# EAGLE board 00B-001-A (EAGLE 6.3)
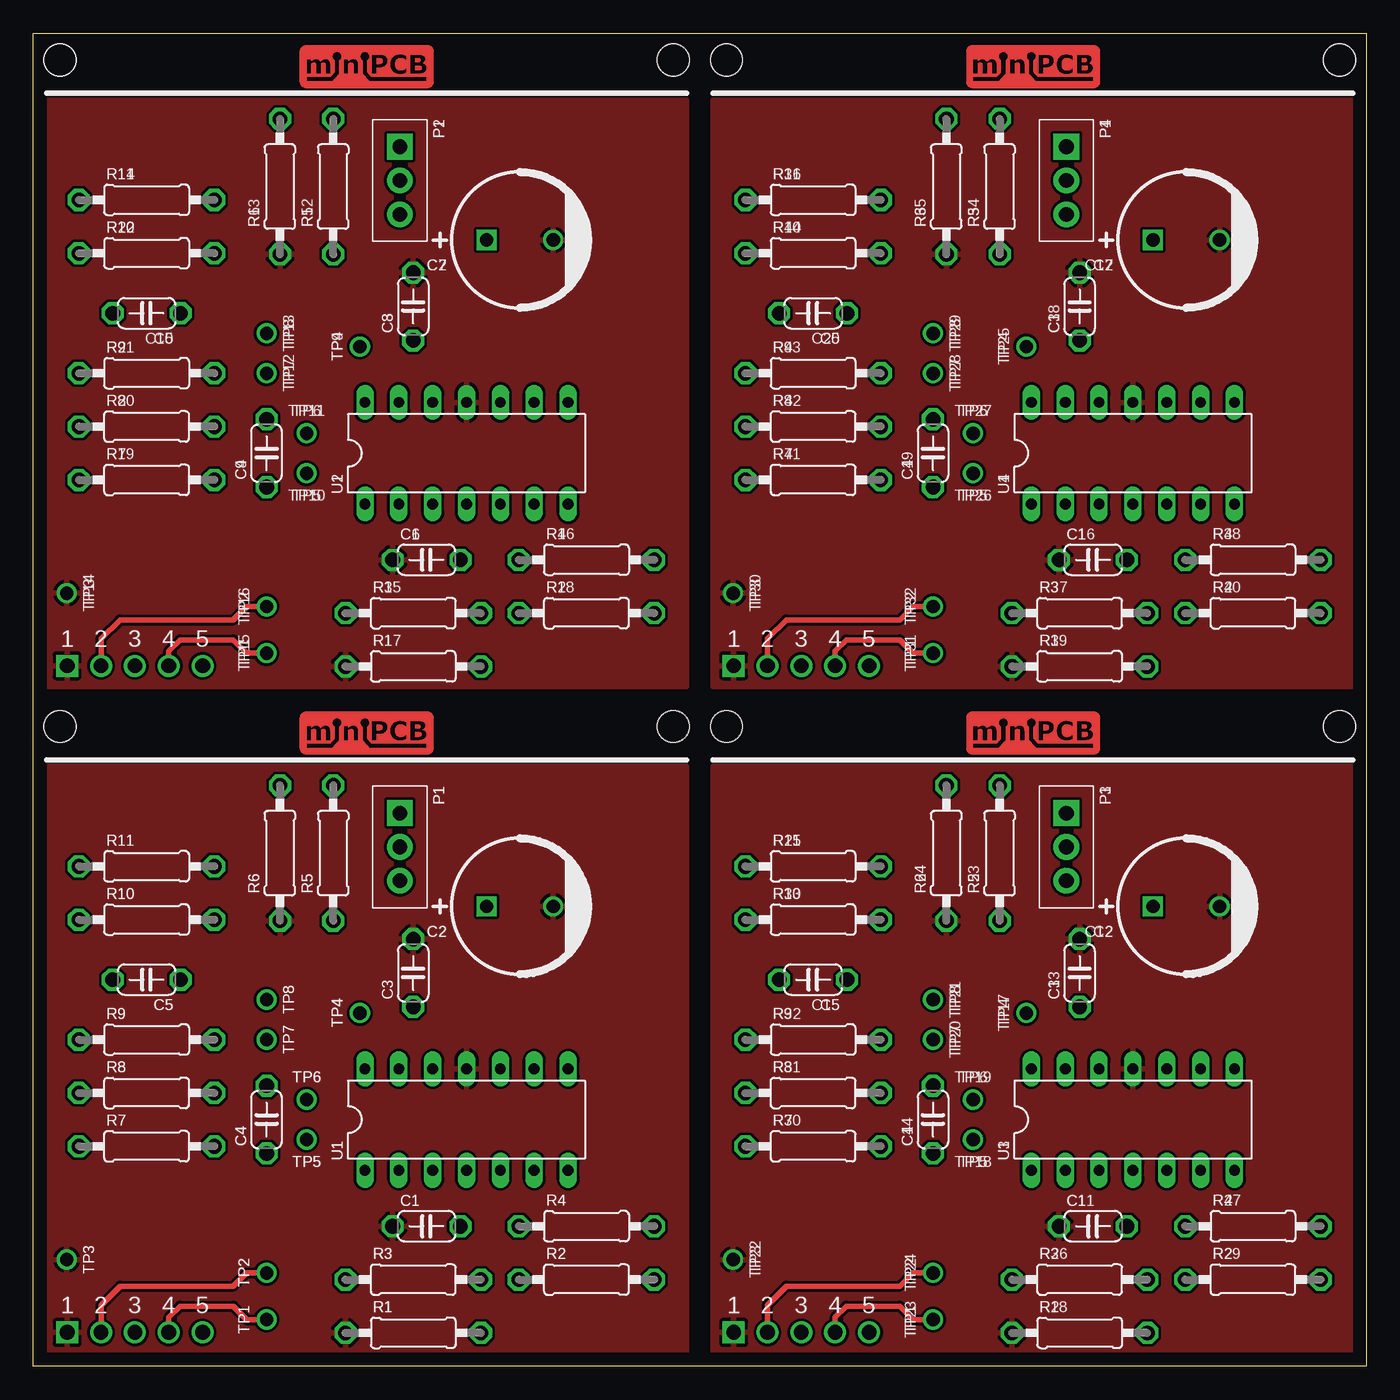
[diagram p0: board, top side]
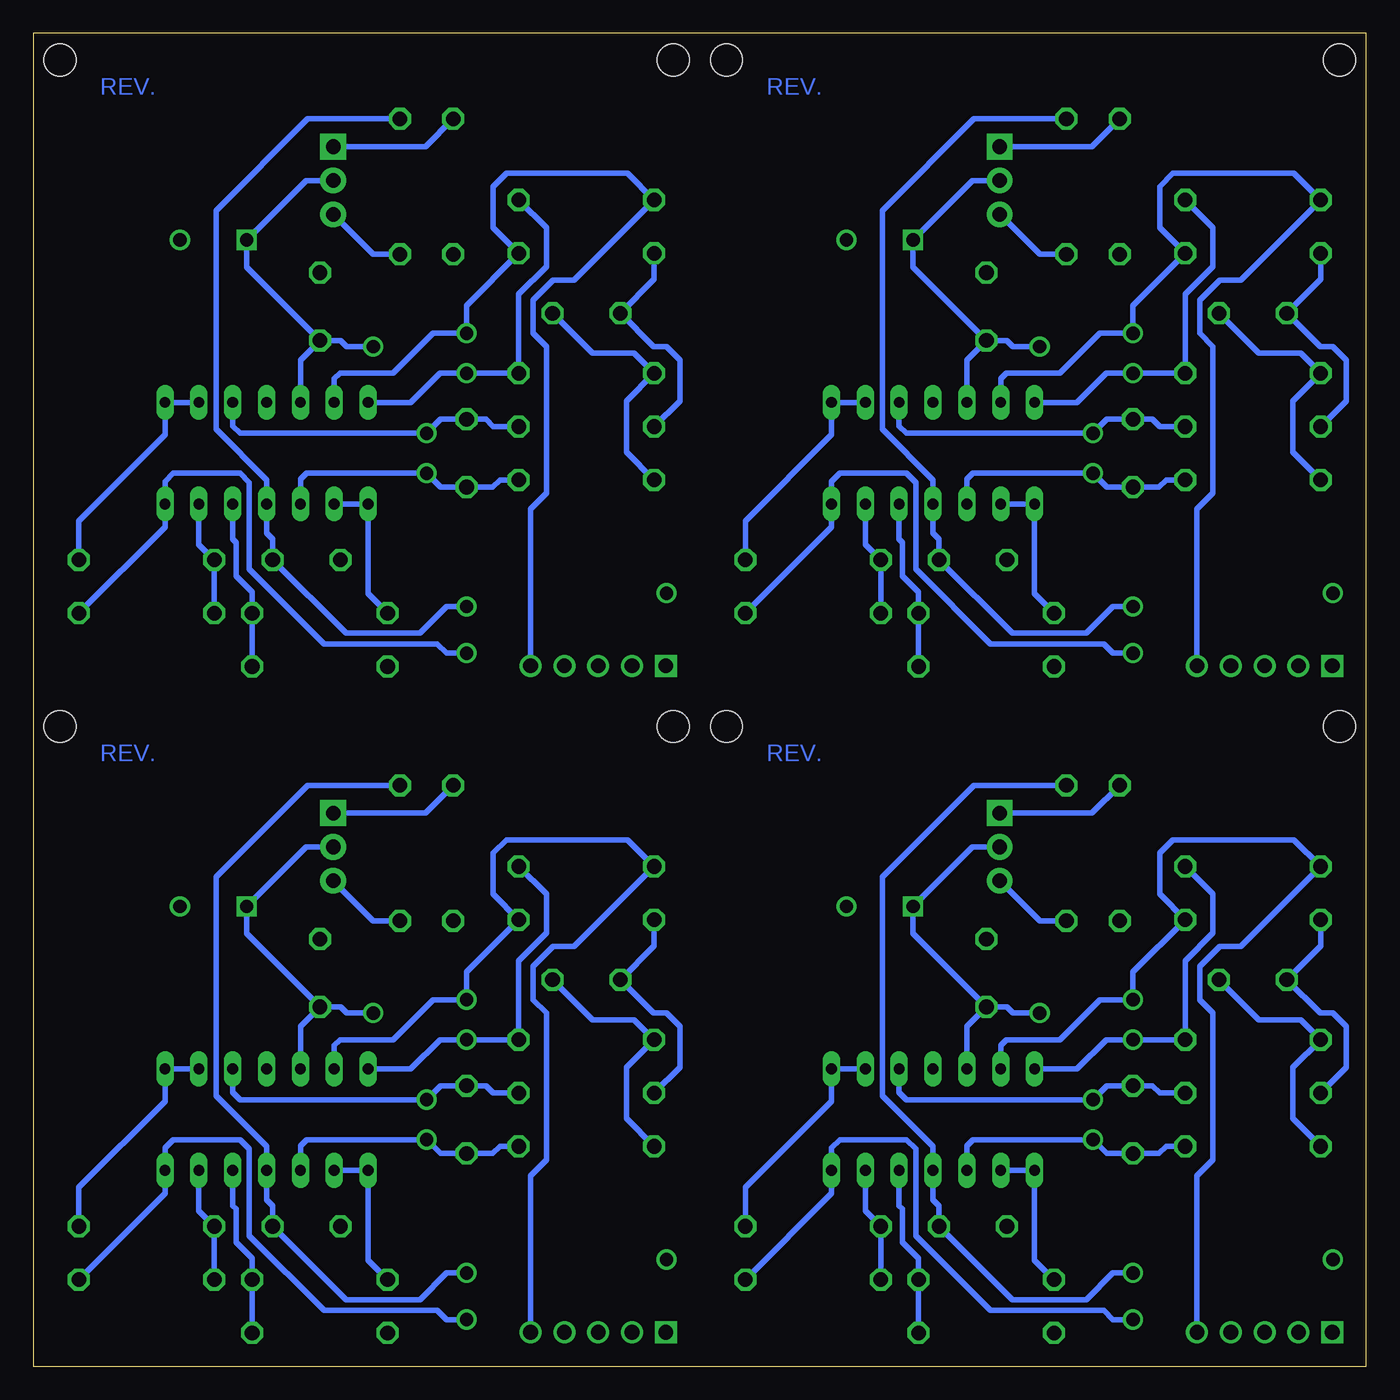
[diagram p1: board, bottom side, seen from below]

Size 100 x 100 mm. Coordinates in mm from the lower left corner, seen from the top.
Outline: 0,0 0,100 100,100 100,0 0,0
Copper layers (1*16): Top 0.035mm / dielectric 1.5mm / Bottom 0.035mm
Design rules "default": minimum track width 10mil, minimum drill 24mil, track to track 8mil, track to pad 8mil, pad to pad 8mil, via to via 8mil, smd to smd 8mil, copper to edge 40mil, drill to drill 8mil, minimum pad ring 10mil, minimum via ring 8mil, stop-mask expansion 4mil, vias tented up to drill 0mil, thermal gap 10mil

## Footprints (pad centres in the part's own frame; a part is rotated, then mirrored left to right if it is on the bottom)
C050-024X044 = drill 1.1 octagon: 1 -2.54,0; 2 2.54,0
C5MM = drill 1 square: + -2.5,0 | drill 1: - 2.5,0
MINIPCB_5P_50X50MM = drill 1.1 square: 1 2.54,2.54 | drill 1.1: 2 5.08,2.54; 3 7.62,2.54; 4 10.16,2.54; 5 12.7,2.54 | hole 2.4: 48,48; 2,48
TRIM_0100 = drill 1.1 pad 1.93 square: 1 0,0 | drill 1.1 pad 1.93: 2 2.54,0; 3 5.08,0
0207/10 = drill 1.1 octagon: 1 -5.08,0; 2 5.08,0
PINS_1_TESTPOINT_KE5000_NOTEXT = drill 1: 1 0,0
DIL14 = drill 0.813 long: 1 -7.62,-3.81; 2 -5.08,-3.81; 3 -2.54,-3.81; 4 0,-3.81; 5 2.54,-3.81; 6 5.08,-3.81; 7 7.62,-3.81; 8 7.62,3.81; 9 5.08,3.81; 10 2.54,3.81; 11 0,3.81; 12 -2.54,3.81; 13 -5.08,3.81; 14 -7.62,3.81

## Placement (x,y rotation side)
C1  1u  [C050-024X044]  29.5,10.5 180 top
C2  [C5MM]  36.5,34.5 0 top
C3  [C050-024X044]  28.5,29.5 90 top
C4  [C050-024X044]  17.5,18.5 90 top
C5  [C050-024X044]  8.5,29 180 top
C6  1u  [C050-024X044]  29.5,60.5 180 top
C7  [C5MM]  36.5,84.5 0 top
C8  [C050-024X044]  28.5,79.5 90 top
C9  [C050-024X044]  17.5,68.5 90 top
C10  [C050-024X044]  8.5,79 180 top
C11  1u  [C050-024X044]  79.5,10.5 180 top
C12  [C5MM]  86.5,34.5 0 top
C13  [C050-024X044]  78.5,29.5 90 top
C14  [C050-024X044]  67.5,18.5 90 top
C15  [C050-024X044]  58.5,29 180 top
C16  1u  [C050-024X044]  79.5,60.5 180 top
C17  [C5MM]  86.5,84.5 0 top
C18  [C050-024X044]  78.5,79.5 90 top
C19  [C050-024X044]  67.5,68.5 90 top
C20  [C050-024X044]  58.5,79 180 top
J7-  [MINIPCB_5P_50X50MM]  0,0 0 top
J7-1  [MINIPCB_5P_50X50MM]  0,50 0 top
J7-2  [MINIPCB_5P_50X50MM]  50,0 0 top
J7-3  [MINIPCB_5P_50X50MM]  50,50 0 top
P1  [TRIM_0100]  27.5,41.5 270 top
P2  [TRIM_0100]  27.5,91.5 270 top
P3  [TRIM_0100]  77.5,41.5 270 top
P4  [TRIM_0100]  77.5,91.5 270 top
R1  [0207/10]  28.5,2.5 180 top
R2  [0207/10]  41.5,6.5 0 top
R3  [0207/10]  28.5,6.5 0 top
R4  [0207/10]  41.5,10.5 180 top
R5  [0207/10]  22.5,38.5 90 top
R6  [0207/10]  18.5,38.5 90 top
R7  [0207/10]  8.5,16.5 0 top
R8  [0207/10]  8.5,20.5 0 top
R9  [0207/10]  8.5,24.5 180 top
R10  [0207/10]  8.5,33.5 180 top
R11  [0207/10]  8.5,37.5 180 top
R12  [0207/10]  22.5,88.5 90 top
R13  [0207/10]  18.5,88.5 90 top
R14  [0207/10]  8.5,87.5 180 top
R15  [0207/10]  28.5,56.5 0 top
R16  [0207/10]  41.5,60.5 180 top
R17  [0207/10]  28.5,52.5 180 top
R18  [0207/10]  41.5,56.5 0 top
R19  [0207/10]  8.5,66.5 0 top
R20  [0207/10]  8.5,70.5 0 top
R21  [0207/10]  8.5,74.5 180 top
R22  [0207/10]  8.5,83.5 180 top
R23  [0207/10]  72.5,38.5 90 top
R24  [0207/10]  68.5,38.5 90 top
R25  [0207/10]  58.5,37.5 180 top
R26  [0207/10]  78.5,6.5 0 top
R27  [0207/10]  91.5,10.5 180 top
R28  [0207/10]  78.5,2.5 180 top
R29  [0207/10]  91.5,6.5 0 top
R30  [0207/10]  58.5,16.5 0 top
R31  [0207/10]  58.5,20.5 0 top
R32  [0207/10]  58.5,24.5 180 top
R33  [0207/10]  58.5,33.5 180 top
R34  [0207/10]  72.5,88.5 90 top
R35  [0207/10]  68.5,88.5 90 top
R36  [0207/10]  58.5,87.5 180 top
R37  [0207/10]  78.5,56.5 0 top
R38  [0207/10]  91.5,60.5 180 top
R39  [0207/10]  78.5,52.5 180 top
R40  [0207/10]  91.5,56.5 0 top
R41  [0207/10]  58.5,66.5 0 top
R42  [0207/10]  58.5,70.5 0 top
R43  [0207/10]  58.5,74.5 180 top
R44  [0207/10]  58.5,83.5 180 top
TP1  [PINS_1_TESTPOINT_KE5000_NOTEXT]  17.5,3.5 90 top
TP2  [PINS_1_TESTPOINT_KE5000_NOTEXT]  17.5,7 90 top
TP3  [PINS_1_TESTPOINT_KE5000_NOTEXT]  2.5,8 270 top
TP4  [PINS_1_TESTPOINT_KE5000_NOTEXT]  24.5,26.5 90 top
TP5  [PINS_1_TESTPOINT_KE5000_NOTEXT]  20.5,17 180 top
TP6  [PINS_1_TESTPOINT_KE5000_NOTEXT]  20.5,20 0 top
TP7  [PINS_1_TESTPOINT_KE5000_NOTEXT]  17.5,24.5 270 top
TP8  [PINS_1_TESTPOINT_KE5000_NOTEXT]  17.5,27.5 270 top
TP9  [PINS_1_TESTPOINT_KE5000_NOTEXT]  24.5,76.5 90 top
TP10  [PINS_1_TESTPOINT_KE5000_NOTEXT]  20.5,67 180 top
TP11  [PINS_1_TESTPOINT_KE5000_NOTEXT]  20.5,70 0 top
TP12  [PINS_1_TESTPOINT_KE5000_NOTEXT]  17.5,74.5 270 top
TP13  [PINS_1_TESTPOINT_KE5000_NOTEXT]  17.5,77.5 270 top
TP14  [PINS_1_TESTPOINT_KE5000_NOTEXT]  2.5,58 270 top
TP15  [PINS_1_TESTPOINT_KE5000_NOTEXT]  17.5,53.5 90 top
TP16  [PINS_1_TESTPOINT_KE5000_NOTEXT]  17.5,57 90 top
TP17  [PINS_1_TESTPOINT_KE5000_NOTEXT]  74.5,26.5 90 top
TP18  [PINS_1_TESTPOINT_KE5000_NOTEXT]  70.5,17 180 top
TP19  [PINS_1_TESTPOINT_KE5000_NOTEXT]  70.5,20 0 top
TP20  [PINS_1_TESTPOINT_KE5000_NOTEXT]  67.5,24.5 270 top
TP21  [PINS_1_TESTPOINT_KE5000_NOTEXT]  67.5,27.5 270 top
TP22  [PINS_1_TESTPOINT_KE5000_NOTEXT]  52.5,8 270 top
TP23  [PINS_1_TESTPOINT_KE5000_NOTEXT]  67.5,3.5 90 top
TP24  [PINS_1_TESTPOINT_KE5000_NOTEXT]  67.5,7 90 top
TP25  [PINS_1_TESTPOINT_KE5000_NOTEXT]  74.5,76.5 90 top
TP26  [PINS_1_TESTPOINT_KE5000_NOTEXT]  70.5,67 180 top
TP27  [PINS_1_TESTPOINT_KE5000_NOTEXT]  70.5,70 0 top
TP28  [PINS_1_TESTPOINT_KE5000_NOTEXT]  67.5,74.5 270 top
TP29  [PINS_1_TESTPOINT_KE5000_NOTEXT]  67.5,77.5 270 top
TP30  [PINS_1_TESTPOINT_KE5000_NOTEXT]  52.5,58 270 top
TP31  [PINS_1_TESTPOINT_KE5000_NOTEXT]  67.5,53.5 90 top
TP32  [PINS_1_TESTPOINT_KE5000_NOTEXT]  67.5,57 90 top
U1  324  [DIL14]  32.5,18.5 0 top
U2  324  [DIL14]  32.5,68.5 0 top
U3  324  [DIL14]  82.5,18.5 0 top
U4  324  [DIL14]  82.5,68.5 0 top

## Library data of the parts
C1-C20 P1-P4 R1-R44 TP1-TP32 U1-U4 = minipcb
J7- J7-1-J7-3 = minipcb; PART_NUMBER: 00B-001; REVISION: A

## Nets
GND: C1.2 C2.- C3.2 J7-.1 R1.2 R6.1 TP3.1 U1.11
GND1: C6.2 C7.- C8.2 J7-1.1 R13.1 R17.2 TP14.1 U2.11
GND2: C11.2 C12.- C13.2 J7-2.1 R24.1 R28.2 TP22.1 U3.11
GND3: C16.2 C17.- C18.2 J7-3.1 R35.1 R39.2 TP30.1 U4.11
N$1: R9.1 R11.1 TP7.1 U1.14
N$2: R3.1 U1.1 U1.2
N$3: R4.1 U1.8 U1.9
N$4: C2.+ C3.1 P1.2 TP4.1 U1.12
N$5: P1.1 R6.2
N$6: P1.3 R5.1
N$7: J7-.5 R10.1 R11.2 TP8.1 U1.13
N$8: R2.1 R4.2 U1.6
N$9: R1.1 R3.2 U1.5
N$10: J7-.4 R2.2 TP1.1 U1.7
N$11: R14.1 R21.1 TP12.1 U2.14
N$12: C7.+ C8.1 P2.2 TP9.1 U2.12
N$13: P2.1 R13.2
N$14: C4.1 R7.2 TP5.1 U1.3
N$15: C4.2 R8.2 TP6.1 U1.10
N$16: C5.1 R7.1 R9.2
N$17: C5.2 R8.1 R10.2
N$18: P2.3 R12.1
N$19: J7-1.5 R14.2 R22.1 TP13.1 U2.13
N$20: R15.1 U2.1 U2.2
N$21: R16.1 U2.8 U2.9
N$22: R16.2 R18.1 U2.6
N$23: R15.2 R17.1 U2.5
N$24: J7-1.4 R18.2 TP15.1 U2.7
N$25: C9.1 R19.2 TP10.1 U2.3
N$26: C9.2 R20.2 TP11.1 U2.10
N$27: C10.1 R19.1 R21.2
N$28: C10.2 R20.1 R22.2
N$29: R25.1 R32.1 TP20.1 U3.14
N$30: C12.+ C13.1 P3.2 TP17.1 U3.12
N$31: P3.1 R24.2
N$32: P3.3 R23.1
N$33: J7-2.5 R25.2 R33.1 TP21.1 U3.13
N$34: R26.1 U3.1 U3.2
N$35: R27.1 U3.8 U3.9
N$36: R27.2 R29.1 U3.6
N$37: R26.2 R28.1 U3.5
N$38: J7-2.4 R29.2 TP23.1 U3.7
N$39: C14.1 R30.2 TP18.1 U3.3
N$40: C14.2 R31.2 TP19.1 U3.10
N$41: C15.1 R30.1 R32.2
N$42: C15.2 R31.1 R33.2
N$43: R36.1 R43.1 TP28.1 U4.14
N$44: C17.+ C18.1 P4.2 TP25.1 U4.12
N$45: P4.1 R35.2
N$46: P4.3 R34.1
N$47: J7-3.5 R36.2 R44.1 TP29.1 U4.13
N$48: R37.1 U4.1 U4.2
N$49: R38.1 U4.8 U4.9
N$50: R38.2 R40.1 U4.6
N$51: R37.2 R39.1 U4.5
N$52: J7-3.4 R40.2 TP31.1 U4.7
N$53: C19.1 R41.2 TP26.1 U4.3
N$54: C19.2 R42.2 TP27.1 U4.10
N$55: C20.1 R41.1 R43.2
N$56: C20.2 R42.1 R44.2
V+: C1.1 J7-.2 R5.2 TP2.1 U1.4
V+1: C6.1 J7-1.2 R12.2 TP16.1 U2.4
V+2: C11.1 J7-2.2 R23.2 TP24.1 U3.4
V+3: C16.1 J7-3.2 R34.2 TP32.1 U4.4

## Tracks (layer width: path | path; a pad name or v marks a point on that pad's centre or on a via)
GND
  pour Top: 1,1 49,1 49,45 1,45
GND1
  pour Top: 1,51 49,51 49,95 1,95
GND2
  pour Top: 51,1 99,1 99,45 51,45
GND3
  pour Top: 51,51 99,51 99,95 51,95
N$1
  Bottom 0.406: U1.14 21.69,22.31 19.5,24.5 TP7.1 R9.1 13.58,30.42 11.5,32.5 11.5,35.42 R11.1
N$2
  Bottom 0.406: R3.1 24.88,7.96 U1.1 U1.2
N$3
  Bottom 0.406: U1.9 U1.8 40.12,19.88 46.58,13.42 R4.1
N$4
  Bottom 0.406: U1.12 29.96,25.5 C3.1 | C3.1 26.96,26.96 26.5,26.5 TP4.1 | C3.1 34,32.46 C2.+ 29.54,38.96 P1.2
N$5
  Bottom 0.406: R6.2 20.58,41.5 P1.1
N$6
  Bottom 0.406: R5.1 24.5,33.42 P1.3
N$7
  Bottom 0.406: U1.13 27.42,24.08 27,24.5 23,24.5 20,27.5 TP8.1 17.5,29.58 R10.1 15.5,35.42 15.5,38.5 14.5,39.5 5.42,39.5 R11.2 9.42,31.5 11,31.5 12.5,30 12.5,27.5 11.5,26.5 11.5,15.5 12.7,14.3 J7-.5
N$8
  Bottom 0.406: R2.1 R4.2 37.58,11.66 U1.6
N$9
  Bottom 0.406: R1.1 R3.2 33.58,8.08 34.8,9.3 34.8,11.8 35.04,12.04 U1.5
N$10
  Top 0.406: J7-.4 10.16,3.66 11,4.5 15,4.5 16,3.5 TP1.1
  Bottom 0.406: TP1.1 19,3.5 19.7,4.2 28.2,4.2 33.8,9.8 33.8,16.3 34.5,17 39.5,17 40.12,16.38 U1.7 40.12,12.96 R2.2
N$11
  Bottom 0.406: U2.14 21.69,72.31 19.5,74.5 TP12.1 R21.1 13.58,80.42 11.5,82.5 11.5,85.42 R14.1
N$12
  Bottom 0.406: U2.12 29.96,75.5 C8.1 | C8.1 26.96,76.96 26.5,76.5 TP9.1 | C8.1 34,82.46 C7.+ 29.54,88.96 P2.2
N$13
  Bottom 0.406: R13.2 20.58,91.5 P2.1
N$14
  Bottom 0.406: R7.2 15,16.5 15.54,15.96 C4.1 19.46,15.96 TP5.1 29.5,17 29.96,16.54 U1.3
N$15
  Bottom 0.406: R8.2 15.5,20.5 16.04,21.04 C4.2 19.46,21.04 TP6.1 34.5,20 35.04,20.54 U1.10
N$16
  Bottom 0.406: R7.1 5.5,18.58 5.5,22.42 R9.2 4.92,26 8.04,26 C5.1
N$17
  Bottom 0.406: R10.2 3.42,31.54 C5.2 3.46,26.5 2.5,26.5 1.5,25.5 1.5,22.42 R8.1
N$18
  Bottom 0.406: R12.1 24.5,83.42 P2.3
N$19
  Bottom 0.406: U2.13 27.42,74.08 27,74.5 23,74.5 20,77.5 TP13.1 17.5,79.58 R22.1 15.5,85.42 15.5,88.5 14.5,89.5 5.42,89.5 R14.2 9.42,81.5 11,81.5 12.5,80 12.5,77.5 11.5,76.5 11.5,65.5 12.7,64.3 J7-1.5
N$20
  Bottom 0.406: R15.1 24.88,57.96 U2.1 U2.2
N$21
  Bottom 0.406: U2.9 U2.8 40.12,69.88 46.58,63.42 R16.1
N$22
  Bottom 0.406: R18.1 R16.2 37.58,61.66 U2.6
N$23
  Bottom 0.406: R17.1 R15.2 33.58,58.08 34.8,59.3 34.8,61.8 35.04,62.04 U2.5
N$24
  Top 0.406: J7-1.4 10.16,53.66 11,54.5 15,54.5 16,53.5 TP15.1
  Bottom 0.406: TP15.1 19,53.5 19.7,54.2 28.2,54.2 33.8,59.8 33.8,66.3 34.5,67 39.5,67 40.12,66.38 U2.7 40.12,62.96 R18.2
N$25
  Bottom 0.406: R19.2 15,66.5 15.54,65.96 C9.1 19.46,65.96 TP10.1 29.5,67 29.96,66.54 U2.3
N$26
  Bottom 0.406: R20.2 15.5,70.5 16.04,71.04 C9.2 19.46,71.04 TP11.1 34.5,70 35.04,70.54 U2.10
N$27
  Bottom 0.406: R19.1 5.5,68.58 5.5,72.42 R21.2 4.92,76 8.04,76 C10.1
N$28
  Bottom 0.406: R22.2 3.42,81.54 C10.2 3.46,76.5 2.5,76.5 1.5,75.5 1.5,72.42 R20.1
N$29
  Bottom 0.406: U3.14 71.69,22.31 69.5,24.5 TP20.1 R32.1 63.58,30.42 61.5,32.5 61.5,35.42 R25.1
N$30
  Bottom 0.406: U3.12 79.96,25.5 C13.1 | C13.1 76.96,26.96 76.5,26.5 TP17.1 | C13.1 84,32.46 C12.+ 79.54,38.96 P3.2
N$31
  Bottom 0.406: R24.2 70.58,41.5 P3.1
N$32
  Bottom 0.406: R23.1 74.5,33.42 P3.3
N$33
  Bottom 0.406: U3.13 77.42,24.08 77,24.5 73,24.5 70,27.5 TP21.1 67.5,29.58 R33.1 65.5,35.42 65.5,38.5 64.5,39.5 55.42,39.5 R25.2 59.42,31.5 61,31.5 62.5,30 62.5,27.5 61.5,26.5 61.5,15.5 62.7,14.3 J7-2.5
N$34
  Bottom 0.406: R26.1 74.88,7.96 U3.1 U3.2
N$35
  Bottom 0.406: U3.9 U3.8 90.12,19.88 96.58,13.42 R27.1
N$36
  Bottom 0.406: R29.1 R27.2 87.58,11.66 U3.6
N$37
  Bottom 0.406: R28.1 R26.2 83.58,8.08 84.8,9.3 84.8,11.8 85.04,12.04 U3.5
N$38
  Top 0.406: J7-2.4 60.16,3.66 61,4.5 65,4.5 66,3.5 TP23.1
  Bottom 0.406: TP23.1 69,3.5 69.7,4.2 78.2,4.2 83.8,9.8 83.8,16.3 84.5,17 89.5,17 90.12,16.38 U3.7 90.12,12.96 R29.2
N$39
  Bottom 0.406: R30.2 65,16.5 65.54,15.96 C14.1 69.46,15.96 TP18.1 79.5,17 79.96,16.54 U3.3
N$40
  Bottom 0.406: R31.2 65.5,20.5 66.04,21.04 C14.2 69.46,21.04 TP19.1 84.5,20 85.04,20.54 U3.10
N$41
  Bottom 0.406: R30.1 55.5,18.58 55.5,22.42 R32.2 54.92,26 58.04,26 C15.1
N$42
  Bottom 0.406: R33.2 53.42,31.54 C15.2 53.46,26.5 52.5,26.5 51.5,25.5 51.5,22.42 R31.1
N$43
  Bottom 0.406: U4.14 71.69,72.31 69.5,74.5 TP28.1 R43.1 63.58,80.42 61.5,82.5 61.5,85.42 R36.1
N$44
  Bottom 0.406: U4.12 79.96,75.5 C18.1 | C18.1 76.96,76.96 76.5,76.5 TP25.1 | C18.1 84,82.46 C17.+ 79.54,88.96 P4.2
N$45
  Bottom 0.406: R35.2 70.58,91.5 P4.1
N$46
  Bottom 0.406: R34.1 74.5,83.42 P4.3
N$47
  Bottom 0.406: U4.13 77.42,74.08 77,74.5 73,74.5 70,77.5 TP29.1 67.5,79.58 R44.1 65.5,85.42 65.5,88.5 64.5,89.5 55.42,89.5 R36.2 59.42,81.5 61,81.5 62.5,80 62.5,77.5 61.5,76.5 61.5,65.5 62.7,64.3 J7-3.5
N$48
  Bottom 0.406: R37.1 74.88,57.96 U4.1 U4.2
N$49
  Bottom 0.406: U4.9 U4.8 90.12,69.88 96.58,63.42 R38.1
N$50
  Bottom 0.406: R40.1 R38.2 87.58,61.66 U4.6
N$51
  Bottom 0.406: R39.1 R37.2 83.58,58.08 84.8,59.3 84.8,61.8 85.04,62.04 U4.5
N$52
  Top 0.406: J7-3.4 60.16,53.66 61,54.5 65,54.5 66,53.5 TP31.1
  Bottom 0.406: TP31.1 69,53.5 69.7,54.2 78.2,54.2 83.8,59.8 83.8,66.3 84.5,67 89.5,67 90.12,66.38 U4.7 90.12,62.96 R40.2
N$53
  Bottom 0.406: R41.2 65,66.5 65.54,65.96 C19.1 69.46,65.96 TP26.1 79.5,67 79.96,66.54 U4.3
N$54
  Bottom 0.406: R42.2 65.5,70.5 66.04,71.04 C19.2 69.46,71.04 TP27.1 84.5,70 85.04,70.54 U4.10
N$55
  Bottom 0.406: R41.1 55.5,68.58 55.5,72.42 R43.2 54.92,76 58.04,76 C20.1
N$56
  Bottom 0.406: R44.2 53.42,81.54 C20.2 53.46,76.5 52.5,76.5 51.5,75.5 51.5,72.42 R42.1
V+
  Top 0.406: J7-.2 5.08,4.58 6.5,6 15,6 16,7 TP2.1
  Bottom 0.406: R5.2 29.42,43.58 36.3,36.7 36.3,20.3 32.5,16.5 U1.4 32.5,12.5 32.04,12.04 C1.1 26.54,5 21,5 19,7 TP2.1
V+1
  Top 0.406: J7-1.2 5.08,54.58 6.5,56 15,56 16,57 TP16.1
  Bottom 0.406: R12.2 29.42,93.58 36.3,86.7 36.3,70.3 32.5,66.5 U2.4 32.5,62.5 32.04,62.04 C6.1 26.54,55 21,55 19,57 TP16.1
V+2
  Top 0.406: J7-2.2 55.08,4.58 56.5,6 65,6 66,7 TP24.1
  Bottom 0.406: R23.2 79.42,43.58 86.3,36.7 86.3,20.3 82.5,16.5 U3.4 82.5,12.5 82.04,12.04 C11.1 76.54,5 71,5 69,7 TP24.1
V+3
  Top 0.406: J7-3.2 55.08,54.58 56.5,56 65,56 66,57 TP32.1
  Bottom 0.406: R34.2 79.42,93.58 86.3,86.7 86.3,70.3 82.5,66.5 U4.4 82.5,62.5 82.04,62.04 C16.1 76.54,55 71,55 69,57 TP32.1

## Text on the board
_tNames: P1 | P1 | R11 | R11 | R10 | R6 | R5 | R10 | R6 | R5 | C2 | C2 | C5 | TP8 | C3 | C5 | TP8 | C3 | R9 | TP4 | R9 | TP4 | TP7 | TP7 | R8 | R8 | TP6 | TP6 | R7 | R7 | C4 | TP5 | C4 | TP5 | U1 | U1 | C1 | R4 | C1 | R4 | TP3 | R3 | R2 | TP3 | R3 | R2 | TP2 | TP2 | R1 | R1 | TP1 | TP1 | P1 | P1 | R11 | R11 | R10 | R6 | R5 | R10 | R6 | R5 | C2 | C2 | C5 | TP8 | C3 | C5 | TP8 | C3 | R9 | TP4 | R9 | TP4 | TP7 | TP7 | R8 | R8 | TP6 | TP6 | R7 | R7 | C4 | TP5 | C4 | TP5 | U1 | U1 | C1 | R4 | C1 | R4 | TP3 | R3 | R2 | TP3 | R3 | R2 | TP2 | TP2 | R1 | R1 | TP1 | TP1